# Allegro board DA_CONVERTOR.brd
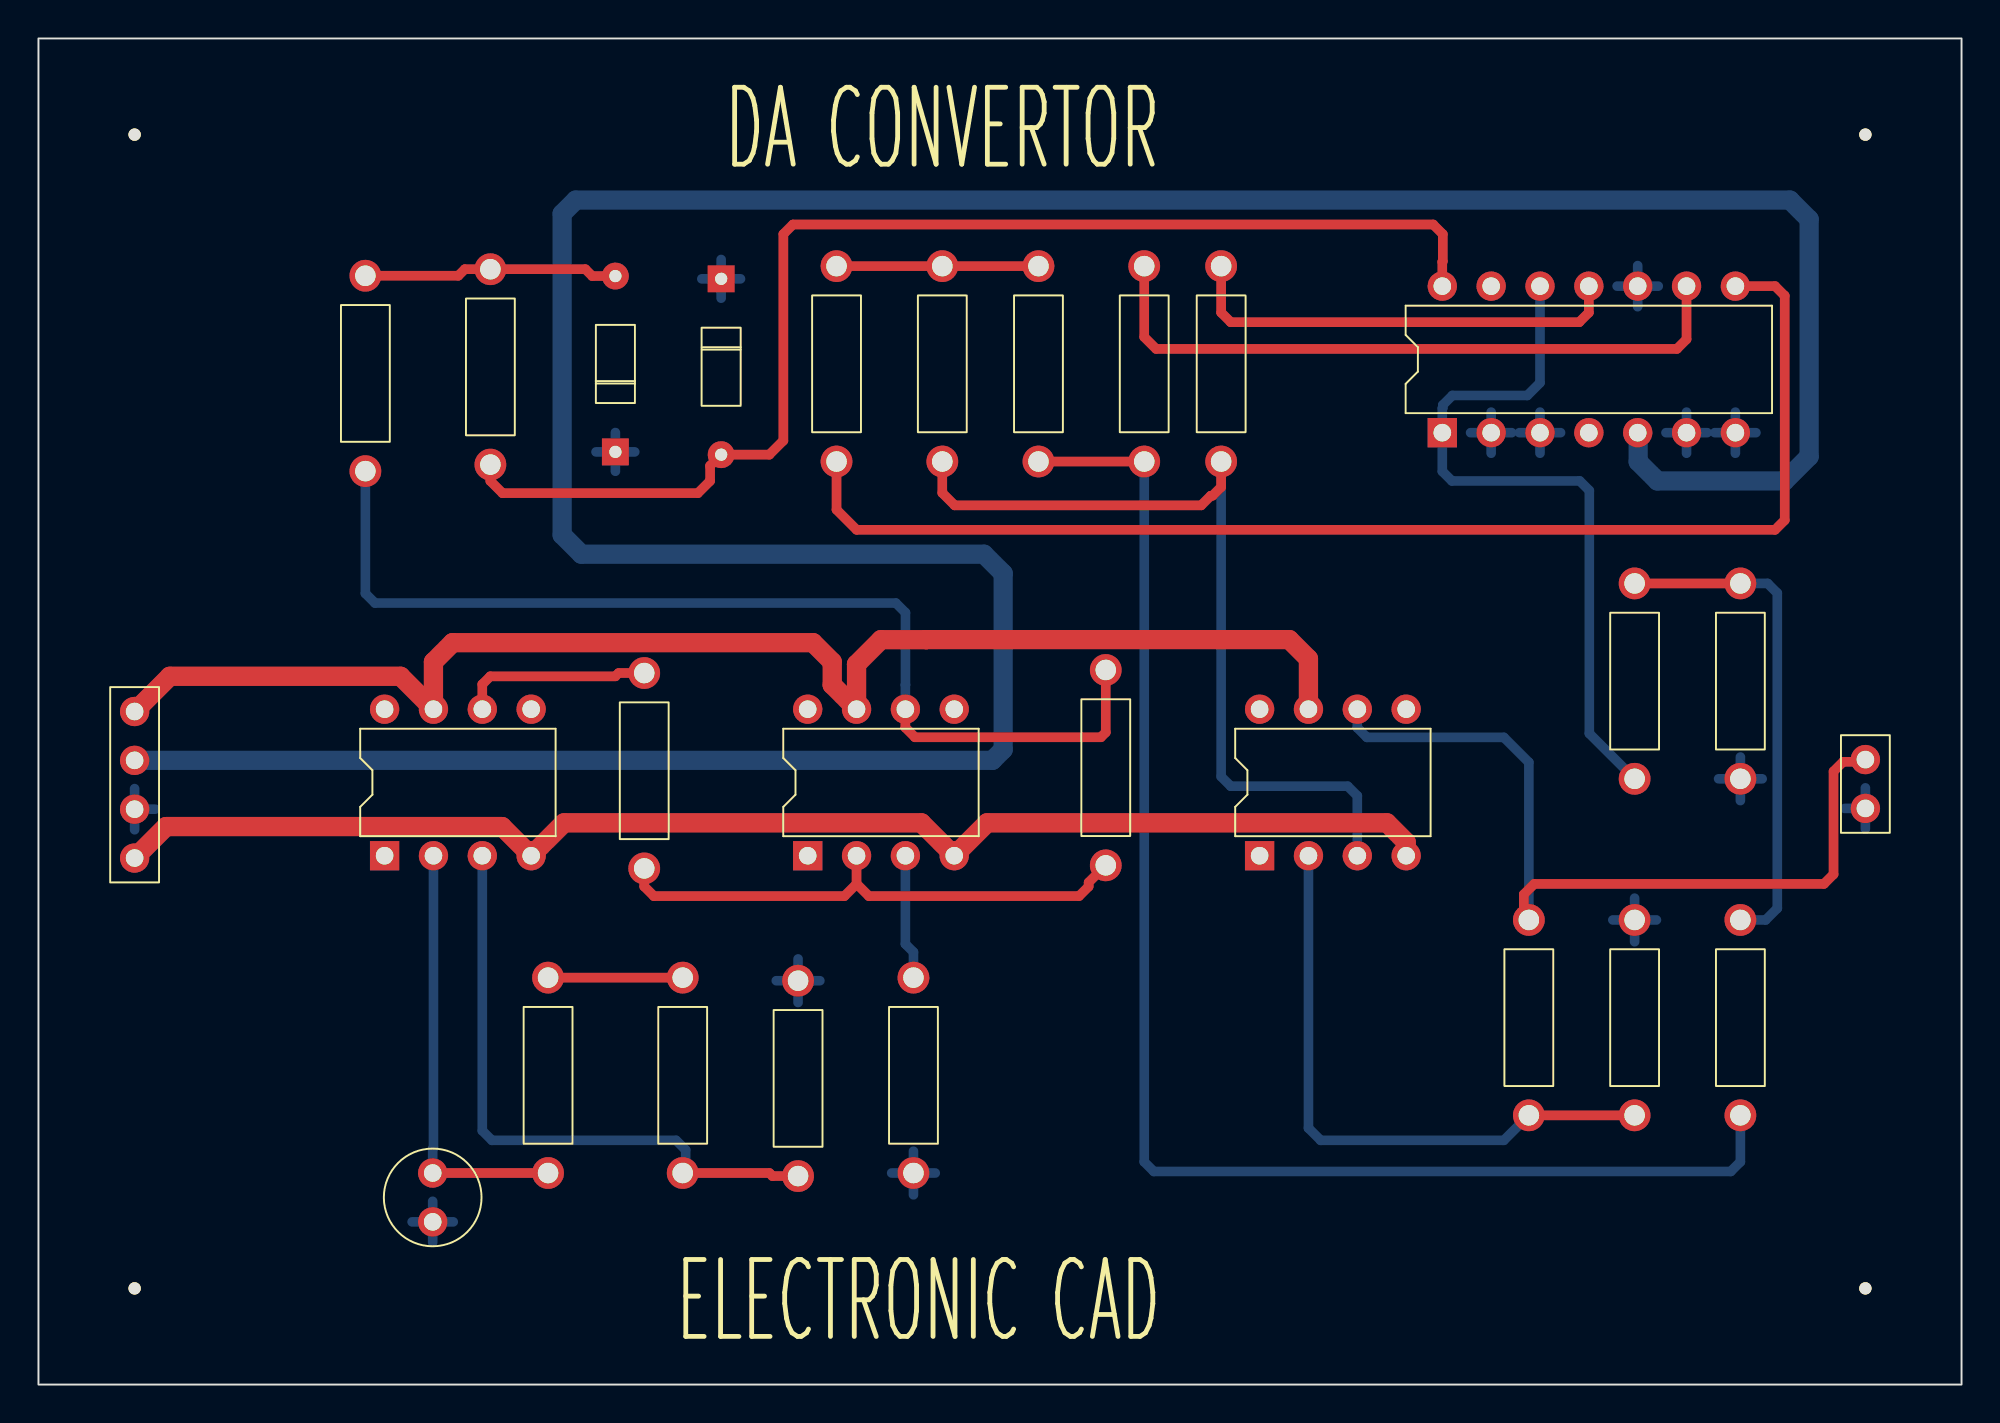
[diagram p0: board, top side]
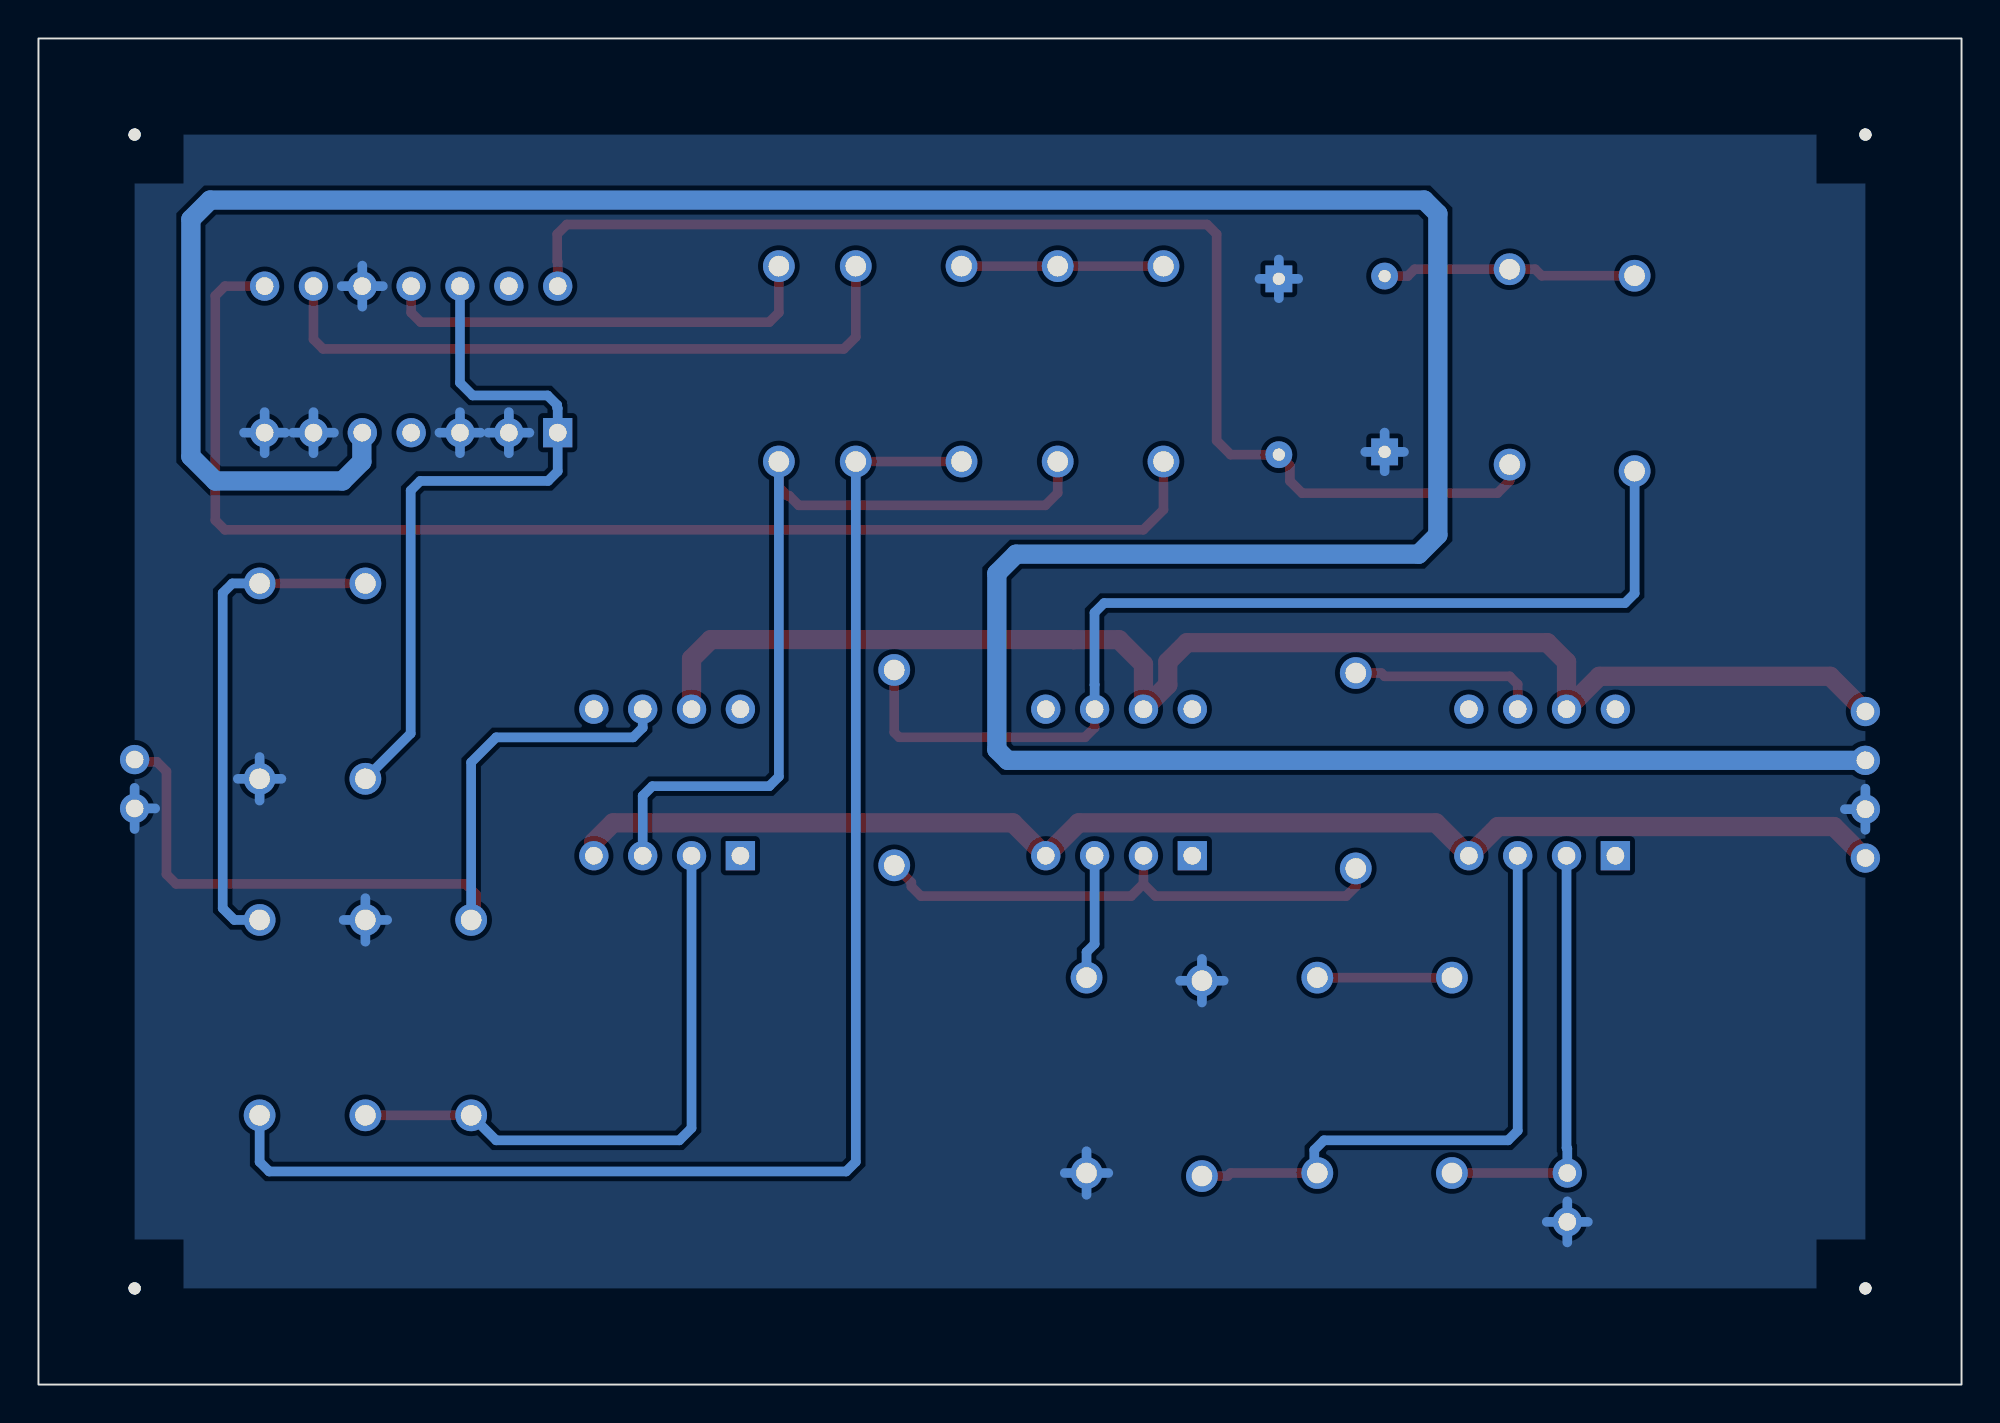
[diagram p1: board, bottom side, seen from below]

Outline 100 x 70 mm; copper layers: TOP, BOTTOM. Coordinates in mm from the lower left corner of the outline.
Outline path: rectangle 0,0 100,70

## Design rules (mm)
constraint set DEFAULT: min track width 0.5
nets with their own width: min track width 1; nets +5V +12V -12V GND

## Placement (name value [footprint] x y rotation side)
C1  0.1uF  [CAP196]  20.5 11 180 top
D1  D1N4148  [DO35]  30 48.5 0 top
D2  RD 5.6A  [DO35]  35.5 57.5 180 top
J1  CON2  [JUMPER2]  95 32.5 270 top
J2  CON4  [JUMPER4]  5 35 270 top
NOREF  -  []  0 0 90 top
NOREF#2  -  [unnamed#2]  95 65 0 top
NOREF#3  -  []  5 5 90 top
NOREF#4  -  [unnamed#2]  5 65 0 top
NOREF#5  -  [unnamed#2]  5 5 0 top
NOREF#6  -  []  0 70 0 top
NOREF#7  -  [unnamed#2]  95 5 0 top
R1  10K  [RES400]  26.5 11 0 top
R2  5.1K  [RES400]  55.5 27 0 top
R3  10K  [RES400]  31.5 37 180 top
R4  1K  [RES400]  17 47.5 0 top
R5  1K  [RES400]  23.5 58 180 top
R6  10K  [RES400]  45.5 11 0 top
R7  6.8K  [RES400]  33.5 11 0 top
R8  1K  [RES400]  39.5 21 180 top
R9  22K  [RES400]  61.5 48 0 top
R10  22K  [RES400]  77.5 14 0 top
R11  10K  [RES400]  47 48 0 top
R12  22K  [RES400]  41.5 48 0 top
R13  10K  [RES400]  52 48 0 top
R14  22K  [RES400]  57.5 48 0 top
R15  10K  [RES400]  88.5 14 0 top
R16  10K  [RES400]  83 14 0 top
R17  22K  [RES400]  83 31.5 0 top
R18  10K  [RES400]  88.5 31.5 0 top
U1  LM741  [DIP8_3]  18 27.5 90 top
U3  74LS90  [DIP14_3]  73 49.5 90 top
U4  LM741  [DIP8_3]  40 27.5 90 top
U5  LM741  [DIP8_3]  63.5 27.5 90 top

## Library data of the parts
C1 = CAP NP: Tolerance: ***; User Part Number: ***
D1 = D1N4148
D2 = RD5_6EB
J1 = CON2: User Part Number: ***
J2 = CON4: User Part Number: ***
R1-R18 = R: Tolerance: ***; User Part Number: ***
U1 U4 U5 = LM741_0: Tolerance: ***; User Part Number: ***
U3 = 74LS90_0: Tolerance: ***; User Part Number: ***

## Footprints (pads in the part's own frame, mm; a bottom-side part is the same pattern mirrored in y, then rotated)
CAP196
  round 1.524 hole 0.914: 1(0,0) 2(0,2.54)
DIP8_3
  rect 1.524x1.524 hole 0.914: 1(0,0)
  round 1.524 hole 0.914: 2(0,-2.54) 3(0,-5.08) 4(0,-7.62) 5(7.62,-7.62) 6(7.62,-5.08) 7(7.62,-2.54) 8(7.62,0)
DIP14_3
  rect 1.524x1.524 hole 0.914: 1(0,0)
  round 1.524 hole 0.914: 2(0,-2.54) 3(0,-5.08) 4(0,-7.62) 5(0,-10.16) 6(0,-12.7) 7(0,-15.24) 8(7.62,-15.24) 9(7.62,-12.7) 10(7.62,-10.16) 11(7.62,-7.62) 12(7.62,-5.08) 13(7.62,-2.54) 14(7.62,0)
DO35
  rect 1.397x1.397 hole 0.635: 1(0,0)
  round 1.397 hole 0.635: 2(0,9.144)
JUMPER2
  round 1.524 hole 0.914: 1(0,0) 2(2.54,0)
JUMPER4
  round 1.524 hole 0.914: 1(0,0) 2(2.54,0) 3(5.08,0) 4(7.62,0)
RES400
  round 1.651 hole 1.067: 1(0,0) 2(0,10.16)
unnamed#2
  round 0.635 hole 3.175 unplated: (0,0)

## Nets
+5V: J2.2 U3.5
+12V: J2.1 U1.7(V-) U4.7(V-) U5.7(V-)
-12V: J2.4 U1.4 U4.4 U5.4
GND: C1.2 D1.1 D2.1 J1.2 J2.3 R6.1 R8.1 R16.2 R18.1 U3.2 U3.3 U3.6 U3.7(R92) U3.10
CLK: D2.2 R5.2 U3.14
OUT: J1.1 R10.2 U5.6
SIG: R9.1 R11.1 U5.3
N00579: C1.1 R1.1 U1.2
N00608: R7.1 R8.2 U1.3
N00631: R1.2 R7.2
N00643: R3.1 U1.6
N00647: R2.1 R3.2 U4.2
N00664: R6.2 U4.3
N00694: R2.2 R4.1 U4.6
N00711: D1.2 R4.2 R5.1
N00930: R17.1 U3.1 U3.12
N01141: R9.2 U3.11
N01160: R12.1 U3.8
N01179: R14.2 U3.9
N01265: R11.2 R12.2 R13.2
N01269: R13.1 R14.1 R15.1
N01273: R15.2 R17.2 R18.2
N01656: R10.1 R16.1 U5.2

Pads without a net: U1 1 5 8; U3 4 13; U4 1 5 8; U5 1 5 8

## Routing (per net, layer and track width the routed paths; a pad name or vN(x,y) marks a point on that pad's centre or on a via; arc(x,y) is an arc through that point)
+5V: length 184.3
  BOTTOM w1: U3.5 83.19,49.48 83.19,47.99 84.19,46.99 90.81,46.99 92.08,48.26 92.08,60.59 91.08,61.59 27.94,61.59 27.23,60.89 27.23,44.18 28.23,43.18 49.16,43.18 50.16,42.18 50.16,33.02 49.6,32.46 J2.2
+12V: length 73.4
  TOP w1: U5.7 66.04,37.74 65.04,38.74 46.16,38.74 46.16,38.73 43.81,38.73 42.54,37.46 U4.7 41.27,36.38 41.27,37.58 40.27,38.58 21.54,38.58 20.54,37.58 U1.7 18.83,36.83 6.83,36.83 J2.1
-12V: length 70.7
  TOP w1: U5.4 71.12,28.21 70.12,29.21 49.33,29.21 U4.4 45.91,29.21 27.33,29.21 U1.4 24.1,29.02 6.64,29.02 J2.4
GND: length 58.2
  BOTTOM w0.5: D1.1 30,49.51 ; D1.1 31.01,48.5 ; D1.1 28.99,48.5 ; D1.1 30,47.49 ; 34.49,57.5 D2.1 ; D2.1 35.5,58.51 ; D2.1 35.5,56.49 ; D2.1 36.51,57.5 ; 87.17,49.5 U3.7 ; U3.7 89.31,49.5 ; U3.7 88.24,50.57 ; U3.7 88.24,48.43 ; 77.01,49.5 U3.3 ; U3.3 78.08,50.57 ; U3.3 79.15,49.5 ; U3.3 78.08,48.43 ; 83.16,56.05 U3.10 ; U3.10 82.09,57.12 ; U3.10 84.23,57.12 ; U3.10 83.16,58.19 ; 45.5,9.87 R6.1 ; R6.1 44.37,11 ; R6.1 45.5,12.13 ; R6.1 46.63,11 ; 88.5,30.37 R18.1 ; R18.1 87.37,31.5 ; R18.1 88.5,32.63 ; R18.1 89.63,31.5 ; 5,28.85 J2.3 ; J2.3 6.07,29.92 ; J2.3 5,30.99 ; U3.6 86.77,49.5 ; U3.6 85.7,48.43 ; U3.6 84.63,49.5 ; U3.6 85.7,50.57 ; 38.37,21 R8.1 ; R8.1 39.5,19.87 ; R8.1 40.63,21 ; R8.1 39.5,22.13 ; 20.5,7.39 C1.2 ; C1.2 20.5,9.53 ; C1.2 21.57,8.46 ; C1.2 19.43,8.46 ; 81.87,24.16 R16.2 ; R16.2 84.13,24.16 ; R16.2 83,25.29 ; R16.2 83,23.03 ; 75.54,48.43 U3.2 ; U3.2 76.61,49.5 ; U3.2 74.47,49.5 ; U3.2 75.54,50.57 ; J1.2 95,31.03 ; J1.2 93.93,29.96 ; J1.2 95,28.89
CLK: length 66.1
  TOP w0.5: R5.2 23.5,46.98 24.13,46.35 34.29,46.35 34.92,46.99 34.92,47.78 D2.2 38,48.36 38.73,49.09 38.73,59.83 39.23,60.33 72.53,60.33 73.03,59.83 73.03,58.41 73,58.39 U3.14
OUT: length 44.1
  TOP w0.5: J1.1 94.89,32.38 93.84,32.38 93.34,31.89 93.34,26.54 92.84,26.04 77.78,26.04 77.24,25.49 77.24,24.42 R10.2
  BOTTOM w0.5: U5.6 68.58,34.16 69.08,33.66 76.2,33.66 77.5,32.35 R10.2
SIG: length 45.1
  TOP w0.5: R11.1 47,46.37 47.65,45.72 60.46,45.72 60.96,46.22 61.05,46.22 61.5,46.67 R9.1
  BOTTOM w0.5: R9.1 61.5,31.61 62,31.11 68.08,31.11 68.58,30.61 U5.3
N00579: length 22.5
  TOP w0.5: C1.1 R1.1
  BOTTOM w0.5: C1.1 20.5,12.27 20.54,12.31 U1.2
N00608: length 32.6
  TOP w0.5: R7.1 38.01,11 38.17,10.84 R8.2
  BOTTOM w0.5: R7.1 33.66,11.15 33.66,12.2 33.16,12.7 23.58,12.7 23.08,13.2 U1.3
N00631: length 7
  TOP w0.5: R1.2 R7.2
N00643: length 10
  TOP w0.5: R3.1 30.17,37 30,36.83 23.5,36.83 23.08,36.41 U1.6
N00647: length 27.9
  TOP w0.5: 42.55,26.04 42.54,26.04 U4.2 ; 42.55,26.04 43.18,25.4 54.11,25.4 54.61,25.9 54.61,26.11 R2.1 ; 42.55,26.04 41.91,25.4 32,25.4 31.5,25.9 R3.2
N00664: length 6.5
  BOTTOM w0.5: R6.2 45.5,22.49 45.08,22.91 U4.3
N00694: length 54.8
  TOP w0.5: U4.6 45.08,34.16 45.58,33.66 55.24,33.66 55.5,33.91 R2.2
  BOTTOM w0.5: R4.1 17,41.14 17.5,40.64 44.59,40.64 45.09,40.14 45.09,36.39 45.08,36.39 U4.6
N00711: length 13.3
  TOP w0.5: R4.2 21.83,57.66 22.17,58 R5.1 28.44,58 28.8,57.64 D1.2
N00930: length 38
  BOTTOM w0.5: U3.12 78.08,52.09 77.42,51.44 73.53,51.44 73.03,50.94 73.03,50.79 73,50.77 U3.1 73,47.49 73.5,46.99 80.14,46.99 80.64,46.49 80.64,33.85 R17.1
N01141: length 23.3
  TOP w0.5: U3.11 80.62,55.74 80.12,55.24 62,55.24 61.5,55.74 R9.2
N01160: length 66.9
  TOP w0.5: U3.8 90.31,57.12 90.81,56.62 90.81,44.95 90.31,44.45 42.55,44.45 41.5,45.49 R12.1
N01179: length 35.1
  TOP w0.5: R14.2 57.5,54.48 58.12,53.86 85.2,53.86 85.7,54.36 U3.9
N01265: length 10.5
  TOP w0.5: R13.2 R11.2 R12.2
N01269: length 75.8
  TOP w0.5: R13.1 R14.1
  BOTTOM w0.5: R14.1 57.5,11.58 58,11.08 88,11.08 88.5,11.58 R15.1
N01273: length 26.2
  TOP w0.5: R17.2 R18.2
  BOTTOM w0.5: R15.2 89.81,24.16 90.42,24.77 90.42,41.16 89.92,41.66 R18.2
N01656: length 31.9
  TOP w0.5: R10.1 R16.1
  BOTTOM w0.5: R10.1 76.2,12.7 66.67,12.7 66.04,13.34 U5.2

## Copper pours and planes (outline as drawn; the poured copper is in the pictures)
GND on BOTTOM: 95,5 95,65 5,65 5,5

## Text on the board
Ref Des/Silkscreen Top: ELECTRONIC CAD | DA CONVERTOR
DIMENSION: FIGURE | FINISHED_SIZE | 0.635 | 0.914 | 1.067 | 3.175 | DRILL CHART: TOP to BOTTOM | ALL UNITS ARE IN MILLIMETERS | PLATED | NON-PLATED | QTY | 4 | 46 | 36
